# EAGLE board ups_unit (EAGLE 9.5.2)
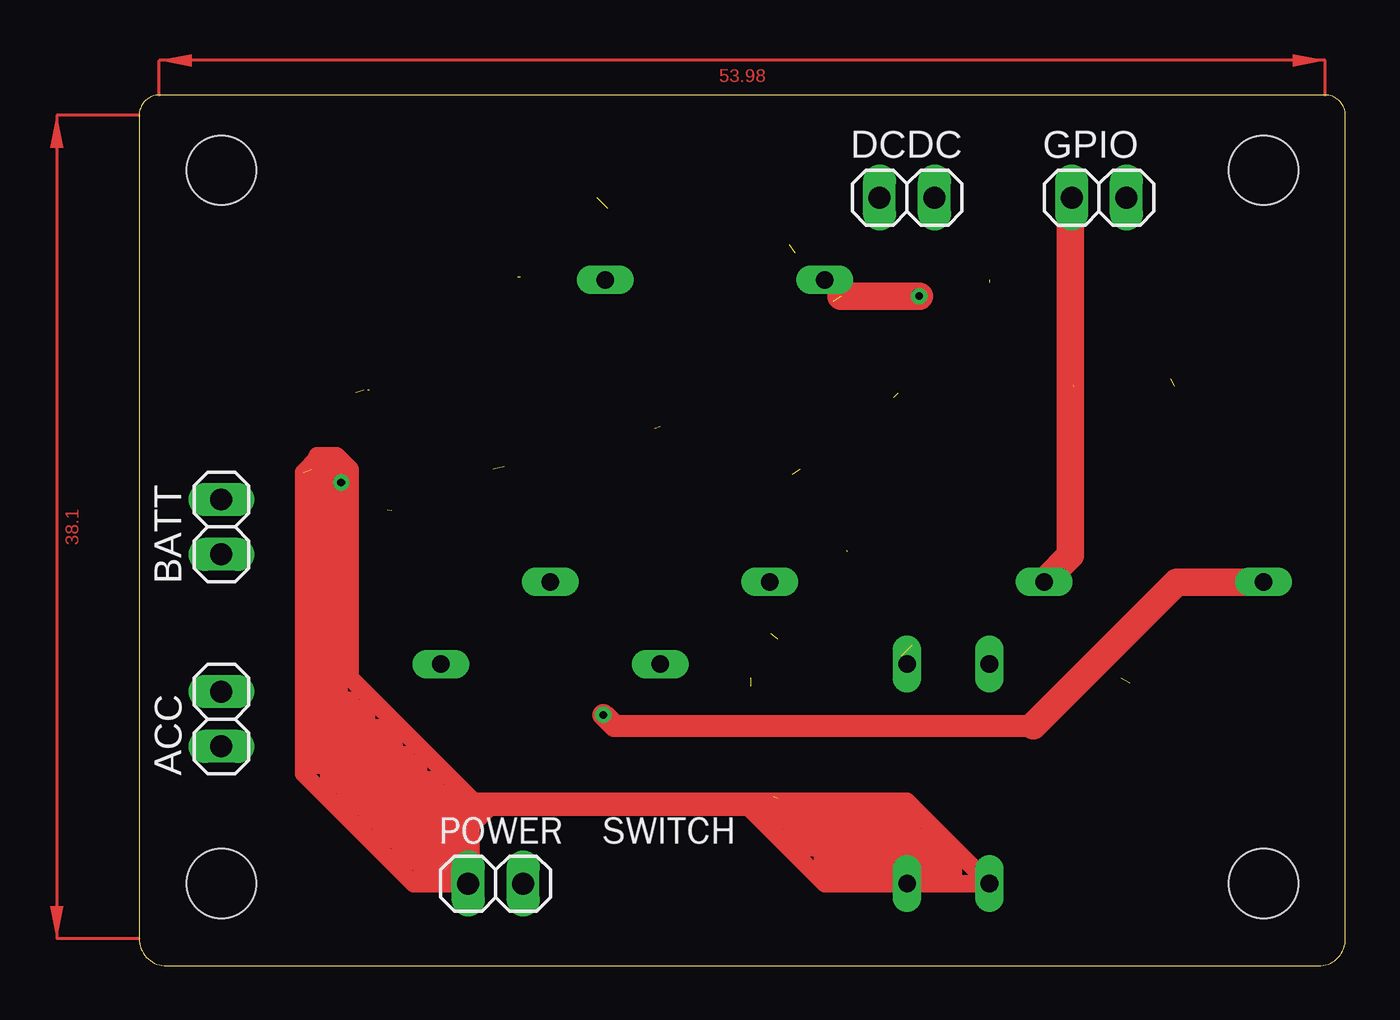
[diagram p0: board, top side]
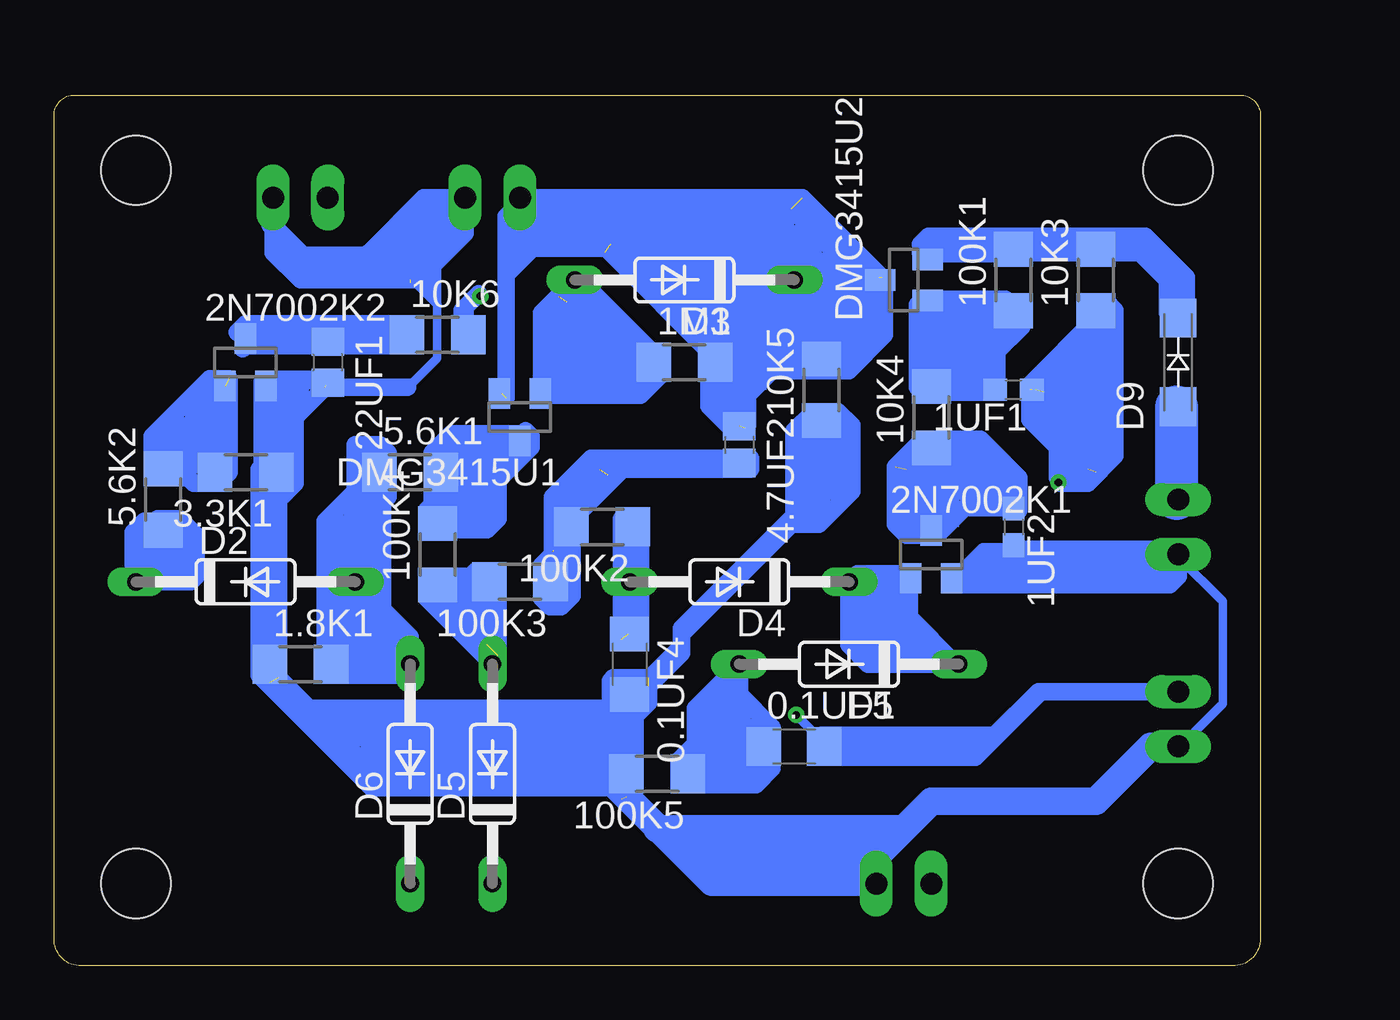
[diagram p1: board, bottom side, seen from below]

Size 55.86 x 40.31 mm. Coordinates in mm from the lower left corner, seen from the top.
Outline: 0,39.37 0,1.27 arc90 1.27,0 54.61,0 arc90 55.86,1.25 55.86,39.37 arc90 54.92,40.31 0.94,40.31 arc90 0,39.37
Copper layers (1*16): Top 0.035mm / dielectric 1.5mm / Bottom 0.035mm
Design rules "default": minimum track width 6mil, minimum drill 0.35mm, track to track 6mil, track to pad 6mil, pad to pad 6mil, via to via 6mil, smd to smd 6mil, copper to edge 40mil, drill to drill 6mil, minimum pad ring 10mil, minimum via ring 8mil, stop-mask expansion 4mil, vias tented up to drill 0mil, thermal gap 10mil
Net classes: 0 default: width 0.4 mm, drill 0.3 mm, clearance 0.3 mm
Holes 3.2 mm at 3.81,3.81 3.81,36.83 52.07,3.81 52.07,36.83

## Footprints (pad centres in the part's own frame; a part is rotated, then mirrored left to right if it is on the bottom)
C1206 = smd 1.6 x 1.8: 1 -1.4,0; 2 1.4,0
R1206 = smd 1.6 x 1.803: 1 -1.422,0; 2 1.422,0
C0603 = smd 1.1 x 1: 1 -0.85,0; 2 0.85,0
SOT23 = smd 1 x 1.4: 1 -0.95,-1.1; 2 0.95,-1.1; 3 0,1.1
C2012 = smd 1.3 x 1.5: 1 -0.85,0; 2 0.85,0
C0805 = smd 1.3 x 1.5: 1 -0.95,0; 2 0.95,0
1X02 = drill 1.016 long: 1 -1.27,0; 2 1.27,0
DO35-10 = drill 0.813 long: A 5.08,0; C -5.08,0
SMA-DO214AC = smd 1.8 x 1.7: A -2.05,0; K 2.05,0

## Placement (x,y rotation side)
0.1UF4  [C1206]  29.21,13.97 270 bottom
0.1UF5  [C1206]  21.59,10.16 0 bottom
1.8K1  [R1206]  44.45,13.97 0 bottom
1M1  [R1206]  26.67,27.94 0 bottom
1UF1  [C0603]  11.43,26.67 180 bottom
1UF2  [C0603]  11.43,20.32 270 bottom
2N7002K1  BCX70SMD  [SOT23]  15.24,19.05 0 bottom
2N7002K2  BCX70SMD  [SOT23]  46.99,27.94 0 bottom
3.3K1  [R1206]  46.99,22.86 180 bottom
4.7UF2  [C2012]  24.13,24.13 270 bottom
5.6K1  [R1206]  39.37,22.86 0 bottom
5.6K2  [R1206]  50.8,21.59 90 bottom
10K3  [R1206]  7.62,31.75 90 bottom
10K4  [R1206]  15.24,25.4 90 bottom
10K5  [R1206]  20.32,26.67 90 bottom
10K6  [R1206]  38.1,29.21 0 bottom
22UF1  [C0805]  43.18,27.94 270 bottom
100K1  [R1206]  11.43,31.75 90 bottom
100K2  [R1206]  30.48,20.32 180 bottom
100K3  [R1206]  34.29,17.78 180 bottom
100K4  [R1206]  38.1,19.05 90 bottom
100K5  [R1206]  27.94,8.89 180 bottom
ACC  [1X02]  3.81,11.43 90 top
BATT  [1X02]  3.81,20.32 90 top
D1  1N4148DO35-10  [DO35-10]  19.05,13.97 180 bottom
D2  1N4148DO35-10  [DO35-10]  46.99,17.78 0 bottom
D3  1N4148DO35-10  [DO35-10]  26.67,31.75 180 bottom
D4  1N4148DO35-10  [DO35-10]  24.13,17.78 180 bottom
D5  1N4148DO35-10  [DO35-10]  35.56,8.89 90 bottom
D6  1N4148DO35-10  [DO35-10]  39.37,8.89 90 bottom
D9  GF1  [SMA-DO214AC]  3.81,27.94 90 bottom
DCDC  [1X02]  35.56,35.56 0 top
DMG3415U1  MMBTA56-SOT23  [SOT23]  34.29,25.4 180 bottom
DMG3415U2  MMBTA56-SOT23  [SOT23]  16.51,31.75 90 bottom
GPIO  [1X02]  44.45,35.56 0 top
POWER　SWITCH  [1X02]  16.51,3.81 0 top

## Library data of the parts
0.1UF4 0.1UF5 1UF1 1UF2 4.7UF2 22UF1 = eagle-ltspice; SPICEMODEL: NONE; SPICEPREFIX: C
1.8K1 1M1 3.3K1 5.6K1 5.6K2 10K3-10K6 100K1-100K5 = eagle-ltspice; SPICEMODEL: NONE; SPICEPREFIX: R
2N7002K1 2N7002K2 = transistor-npn
ACC BATT DCDC GPIO POWER　SWITCH = pinhead
D1-D6 D9 = diode
DMG3415U1 DMG3415U2 = transistor-pnp

## Nets
ACC: 0.1UF5.2 5.6K2.1 ACC.2 D2.C
BATT: BATT.2 D9.A
DCDC: 1M1.2 4.7UF2.1 10K5.2 D3.C DCDC.1 DMG3415U1.2 DMG3415U2.3
GND: 0.1UF4.2 1.8K1.1 1UF2.2 2N7002K1.2 2N7002K2.2 3.3K1.1 10K5.1 22UF1.2 100K5.2 ACC.1 BATT.1 DCDC.2 GPIO.2 POWER　SWITCH.2
GPIO: 1.8K1.2 5.6K1.1 D2.A D6.A GPIO.1
N$1: 2N7002K2.3 10K6.1 22UF1.1
N$103: 10K3.2 100K1.2 D9.K DMG3415U2.2
N$104: 1UF1.1 10K3.1 D5.C D6.C POWER　SWITCH.1
N$105: 1UF1.2 10K4.2 100K1.1 DMG3415U2.1
N$106: 1UF2.1 2N7002K1.3 10K4.1
N$107: 2N7002K1.1 D1.C D4.C
N$108: 0.1UF4.1 100K2.1 D4.A
N$110: 4.7UF2.2 100K2.2 100K3.1
N$111: 5.6K1.2 100K4.2 DMG3415U1.3
N$113: 100K3.2 100K4.1 D5.A
N$115: 0.1UF5.1 100K5.1 D1.A
N$116: 1M1.1 10K6.2 D3.A DMG3415U1.1
N$118: 2N7002K2.1 3.3K1.2 5.6K2.2

## Tracks (layer width: path | path; a pad name or v marks a point on that pad's centre or on a via)
ACC  (via drill 0.35)
  Top 0.4: 52,17.75 D2.C
  Top 1.016: 41.41,11.12 22.01,11.12 v21.5,11.62
  Top 1.27: 52,17.75 48.04,17.75 41.41,11.12
  Bottom 0.4: 5.6K2.1 50.88,20.12 50.88,19 52,17.88 D2.C | ACC.2 3.88,12.62 10.12,12.62 12.5,10.25 20.12,10.25 0.1UF5.2 20.25,10.38 v21.5,11.62
  Bottom 0.813: ACC.2 10.16,12.7 13.21,9.65 20.45,9.65 20.45,10.54 20.32,10.67 12.83,10.67 12.32,10.67 10.29,12.7
BATT
  Bottom 0.4: 3.88,25.88 D9.A | 3.88,21.62 BATT.2
  Bottom 2: 3.88,21.62 3.88,25.88
DCDC  (5 unrouted)
  Bottom 0.4: 35.12,33 35.12,34.75 34.38,35.5 DCDC.1 | 35.12,33 35.12,26.5 DMG3415U1.2 | 24.25,27 24.25,25 4.7UF2.1 | 24.25,27 25.12,27.88 1M1.2 25.38,28 30.38,33 35.12,33 | DMG3415U2.3 D3.C 20.38,31.62 20.38,30.75 | 20.38,30.75 20.38,28.12 10K5.2 | 24.25,27 20.5,30.75 20.38,30.75
  Bottom 0.813: 17.53,31.88 21.21,35.56 DCDC.1 | 30.1,33.4 25.78,29.08 25.27,29.08 25.27,29.34 26.42,30.48 26.16,30.23 25.4,30.23 | 18.41,32.13 18.8,32.13 21.72,35.05 | 17.65,31.88 18.54,30.99 18.54,28.45 19.43,27.56 20.7,27.56 | 20.7,27.56 25.4,27.56 | 22.73,27.43 23.75,26.42 23.75,25.02 23.88,24.89 24.51,24.89 25.53,25.91 25.53,28.57 | 17.4,31.62 17.4,29.21 19.05,27.56 20.7,27.56 | 20.7,27.56 19.05,29.21 17.78,29.21 17.78,30.61 18.16,30.99 | 33.78,33.15 34.92,32 34.92,26.29
GND  (5 unrouted)
  Bottom 0.4: DCDC.2 36.88,35.5 38.12,35.5 38.12,28.12 39.25,27 43,27 22UF1.2 43.25,26.88 46,26.88 2N7002K2.2 45.62,26.75 45.62,22.88 3.3K1.1 45.75,22.75 45.75,14 1.8K1.1 45.87,13.1 44.9,12.12 29.38,12.12 0.1UF4.2 | 45.75,35.5 GPIO.2 | 2N7002K1.2 14.25,18 12.88,19.38 11.5,19.38 1UF2.2 11.25,19.5 4.25,19.5 3.88,19.12 BATT.1 3.75,18.88 1.75,16.88 1.75,12.12 3.71,10.16 ACC.1 4,10.12 | 0.1UF4.2 29.25,12.5 29.25,9 100K5.2 | 10K5.1 20.38,25.12 20.38,21.5 29.12,12.75 0.1UF4.2 | 17.88,3.88 POWER　SWITCH.2 17.75,4 | 38.1,30.61 39.12,31.62 39.37,31.62 38.73,31.62 38.35,31.24 38.48,31.37 38.48,31.75
  Bottom 0.813: 11.43,19.05 BATT.1 3.81,18.03 4.19,17.65 13.84,17.65 13.97,17.78 12.7,19.05 11.43,19.05 | 43.69,32.89 41.4,32.89 41.02,33.27 38.73,35.56 DCDC.2 36.83,33.91 | 43.69,32.89 44.32,32.89 45.72,34.29 45.85,34.29 45.85,35.43 GPIO.2 45.72,33.02 44.45,31.75 39.37,31.75 38.99,31.75 36.83,33.91 | 12.83,18.16 12.83,17.91 12.7,17.78 11.43,19.05 | 28.96,8.89 28.96,11.56 28.32,12.19 28.32,13.34 29.97,13.34 30.1,13.21 30.1,8.26 | 30.1,8.26 29.46,7.62 29.59,7.75 29.59,11.81 | 46.23,27.05 46.23,24.13 45.72,23.62 45.97,23.37 46.35,22.99 46.35,13.46 41.15,8.26 30.1,8.26 | 30.23,11.68 43.81,11.68 45.47,13.34 41.02,8.89 40.89,8.76 30.23,8.76 40.01,8.76 41.27,10.03 | 45.47,14.48 45.47,21.59 44.96,22.1 44.7,22.35 44.7,25.4 43.31,26.8 39.5,26.8 | 36.83,33.91 37.85,32.89 43.69,32.89 | 20.7,25.65 21.59,24.77 21.59,20.83 26.8,15.62 26.8,14.48 28.32,12.95 28.45,12.95
  Bottom 1.27: 17.88,3.88 25.39,3.88 29.36,7.84 100K5.2 | POWER　SWITCH.2 17.78,5.08 16.51,6.35 | 16.51,6.35 15.24,7.62 7.62,7.62 5.08,10.16 ACC.1 | 27.94,6.35 16.51,6.35
GPIO
  Top 0.4: 43.12,35.5 GPIO.1 | 42,17.88 D2.A
  Top 1.27: 43.12,35.5 43.12,19 42,17.88
  Bottom 0.4: 41.88,14 39.38,14 D6.A | 41.88,14 43,14 1.8K1.2 | 5.6K1.1 40.88,22.75 40.88,18.88 41.88,17.88 D2.A 41.88,17.62 41.88,14
  Bottom 0.813: 43.31,16.26 43.31,16.38 43.18,16.51 D2.A 39.37,15.24 D6.A 39.88,13.46 43.31,13.46 43.31,16.26 | 40.64,16.64 40.64,21.46 40.39,21.72 40.39,23.5 40.39,23.75 40.77,24.13 41.91,24.13 41.91,21.97 43.18,20.7 43.31,20.57 43.31,16.26
N$1
  Bottom 0.4: 2N7002K2.3 46.88,29 43.25,29 22UF1.1 43.12,29.12 39.62,29.12 10K6.1
N$2
  Bottom 0.813: 11.43,30.48 11.81,30.86 15.62,30.86 15.88,30.61 15.88,26.8 15.62,26.54 12.19,26.54 12.19,28.45 11.05,29.59 11.05,30.61 11.18,30.73
N$3
  Bottom 0.813: 47.12,28.57 46.99,28.7 39.88,28.7 39.88,29.46 39.62,29.72 46.35,29.72 | 46.35,29.72 46.48,29.59 46.35,29.72 | 46.35,29.72 46.99,29.72 47.37,29.34 47.24,29.21 42.67,29.21
N$4
  Bottom 0.813: 40.01,14.99 41.66,16.64 42.42,16.64
N$5
  Bottom 0.813: 15.62,32.89 15.62,33.4 15.75,33.4 15.37,33.78 5.33,33.78 3.43,31.88 3.43,30.1
N$6
  Bottom 0.813: 4.32,30.23 4.32,31.62
N$7
  Bottom 0.813: 12.19,29.34 12.7,28.83 12.7,27.05
N$8
  Bottom 0.813: 36.2,31.11 36.96,30.35 36.96,28.7
N$9
  Bottom 0.813: 34.29,24.64 37.47,24.64 38.1,24 38.35,23.75 38.35,22.1 38.35,21.34 38.61,21.08 38.61,20.19 38.48,20.07 38.35,20.19 35.81,20.19 35.31,20.7 35.31,22.48 33.91,23.88 33.78,24 33.78,24.38 33.78,24.51 34.04,24.77
N$10
  Bottom 0.813: 18.92,32.13 18.92,28.45
N$11
  Bottom 0.813: 50.8,20.57 51.69,20.57 52.2,20.07 52.2,17.78 49.53,17.78 49.28,18.03 49.28,19.94 50.04,20.7 51.05,20.7
N$13
  Bottom 0.813: 20.57,25.65 19.56,25.65 18.92,25.02 18.92,21.97 20.45,20.45 21.84,20.45
N$103
  Bottom 0.4: DMG3415U2.2 15.38,32.75 11.88,32.75 11.5,33.12 100K1.2 11.25,33.12 7.75,33.12 10K3.2 6.02,33.17 3.81,30.96 3.81,30.48 D9.K
  Bottom 0.813: 3.81,30.48 3.81,31.75 5.08,33.02 15.75,33.02
N$104  (via drill 0.35)  (3 unrouted)
  Top 0.4: D6.C 39.25,3.88 35.62,3.88 D5.C 35.38,3.88 32.1,7.14 15.98,7.14 9.36,13.77 v9.36,22.38 | 15.25,3.88 POWER　SWITCH.1
  Top 0.813: POWER　SWITCH.1 12.7,3.81 7.62,8.89 7.62,22.86 8.26,23.5 8.26,23.62 9.14,23.62 9.78,22.99 9.78,13.34 15.37,7.75 15.37,3.81 | 17.78,7.62 35.56,7.62 D6.C 31.75,3.81 27.94,7.62 17.78,7.62 | 17.78,7.62 15.24,7.62 | 17.78,7.62 16.51,7.62 15.24,6.35
  Bottom 0.4: 10K3.1 7.62,30.25 10.89,26.98 1UF1.1 9.36,25.45 v9.36,22.38
  Bottom 0.813: 9.27,22.35 8,22.35 6.73,23.62 6.73,30.1 6.73,30.35 7.11,30.73 8.13,30.73 8.13,28.96 10.41,26.67 10.67,26.67 10.67,25.27 9.4,24 9.4,22.61 | 7.37,29.59 7.37,23.62 8,22.99 8.89,22.99 8.89,27.3 9.02,27.43 9.78,26.67 9.91,26.67 10.03,26.54 10.03,25.4 9.91,25.4 9.65,25.15
N$105
  Bottom 0.4: 1UF1.2 12.38,26.75 15.12,26.75 10K4.2 15.38,26.88 15.38,30.75 DMG3415U2.1 15.25,30.38 11.5,30.38 100K1.1
N$106  (2 unrouted)
  Bottom 0.4: 1UF2.1 11.5,21.12 14.25,21.12 15.12,20.25 2N7002K1.3 15.12,20.5 15.12,23.88 10K4.1
  Bottom 0.813: 12.06,22.86 12.32,23.11 13.08,23.11 12.83,23.37 13.21,22.99 16.38,22.99 | 11.18,21.08 11.18,22.61 12.95,24.38 15.62,24.38 16.89,23.11 16.89,20.45 16.38,19.94 15.24,19.94 14.99,19.94 13.72,21.21 11.81,21.21 11.68,21.08
N$107
  Bottom 0.4: 2N7002K1.1 16.25,17.88 19,17.88 D4.C 17.75,17.75 D1.C
  Bottom 0.813: D1.C 14.1,13.97 | 14.1,13.97 17.78,13.97 18.16,13.97 19.05,14.86 D4.C 18.67,18.16 16.26,18.16 16.26,16.13 14.1,13.97
N$108  (1 unrouted)
  Bottom 0.4: 0.1UF4.1 29.25,15.38 29.25,17.75 D4.A 29.12,17.88 29.12,20.25 100K2.1
  Bottom 0.813: 28.7,15.11 28.7,20.83 29.46,20.83 29.59,20.7 29.59,15.11
N$110  (2 unrouted)
  Bottom 0.4: 4.7UF2.2 24.25,23.25 29,23.25 31.88,20.38 100K2.2 31.88,20.12 32.75,19.25 32.75,17.88 100K3.1
  Bottom 0.813: 32,20.83 30.23,22.61 30.23,22.73 | 23.62,23.5 30.99,23.5 32.26,22.23 32.77,21.72 32.77,19.18 32.77,19.05 33.27,18.54 33.27,17.27 33.27,17.02 32.89,16.64 32.38,16.64 31.88,17.14 31.88,19.68 32.38,19.18 32.38,18.92 32.38,21.21 30.61,22.99 23.62,22.99 23.62,23.37
N$111
  Bottom 0.4: 36.88,21.75 38.12,20.5 100K4.2 | 36.88,21.75 34.38,24.25 DMG3415U1.3 | 36.88,21.75 37.88,22.75 5.6K1.2
N$113  (1 unrouted)
  Bottom 0.4: 100K4.1 38,17.75 35.75,17.75 100K3.2 35.62,17.62 35.62,14 D5.A
  Bottom 0.813: D5.A 38.61,17.02 38.61,17.27 38.61,17.91 38.48,18.03 37.59,18.03 36.58,18.03 36.32,18.29 35.31,18.29 35.31,14.35 35.69,13.97 | 35.81,14.86 35.81,14.99 37.59,16.76
N$115
  Bottom 0.4: 24.12,10.12 25.38,10.12 26.5,9 100K5.1 | 24.12,10.12 23,10.12 0.1UF5.1 | 24.12,10.12 24.12,13.88 D1.A
  Bottom 0.813: D1.A 26.16,11.94 26.16,10.29 26.92,9.53 26.92,8.38 23.37,8.38 22.61,9.14 22.61,11.05 24.13,12.57 D1.A
N$116  (via drill 0.35)  (1 unrouted)
  Top 0.4: D3.A 32.5,31
  Top 1.27: 32.5,31 v36.12,31
  Bottom 0.4: 31.75,26.5 29.5,26.5 28.12,27.88 1M1.1 | 31.75,26.5 DMG3415U1.1 | v36.12,31 36.62,30.5 36.62,29.25 10K6.2 | D3.A 31.75,26.5
  Bottom 0.813: 27.94,28.19 31.5,31.75 D3.A 33.27,30.23 33.27,26.42 28.7,26.42 27.81,27.3 | 29.08,26.92 29.08,28.7 31.37,30.99 31.62,30.99 31.88,30.99 32.13,30.73
N$118  (1 unrouted)
  Bottom 0.4: 2N7002K2.1 48,26.75 48,23.25 48.38,22.88 3.3K1.2 48.5,23 50.75,23 5.6K2.2
  Bottom 0.813: 47.75,27.18 47.75,22.86 48.26,22.35 49.4,22.35 49.66,22.61 51.05,22.61 51.31,22.86 51.31,24.51 48.64,27.18 47.75,27.18
(copper drawn outside any net)
  shapes: Bottom area x83, Top area x30

## Text on the board
Document: DCDCconvertor | GND | GPIO | GND | BATT | GND | ACC | GND | POWER | GND